# Altium PCB PCB.PcbDoc
Units mm, origin at the board's own origin, x right, y up, seen from the top; angles counter-clockwise.
Board outline 100 x 70 mm, 2 copper layers (Top Layer, Bottom Layer); 76 components, 40 nets, 292 pads, 35 vias.
Unrouted connection lines stored in the file: 70.
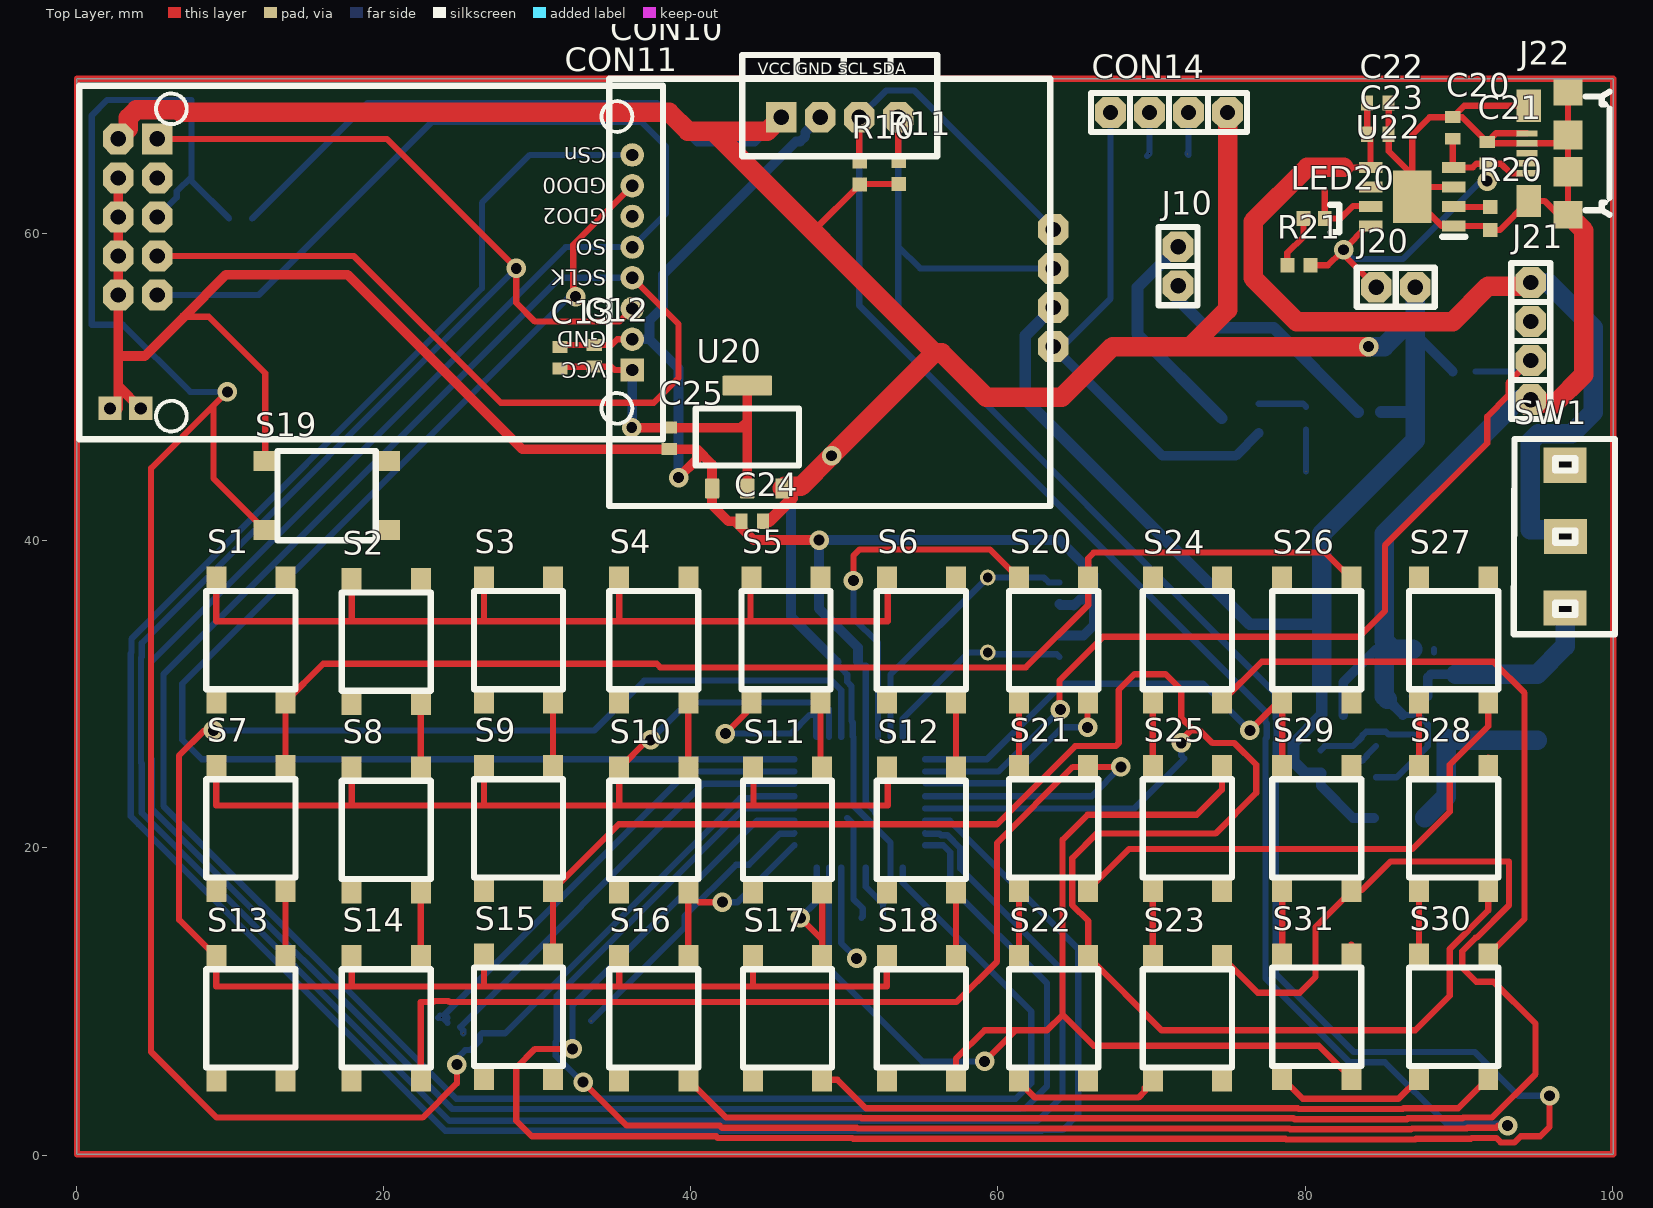
[diagram p0: Top Layer view]
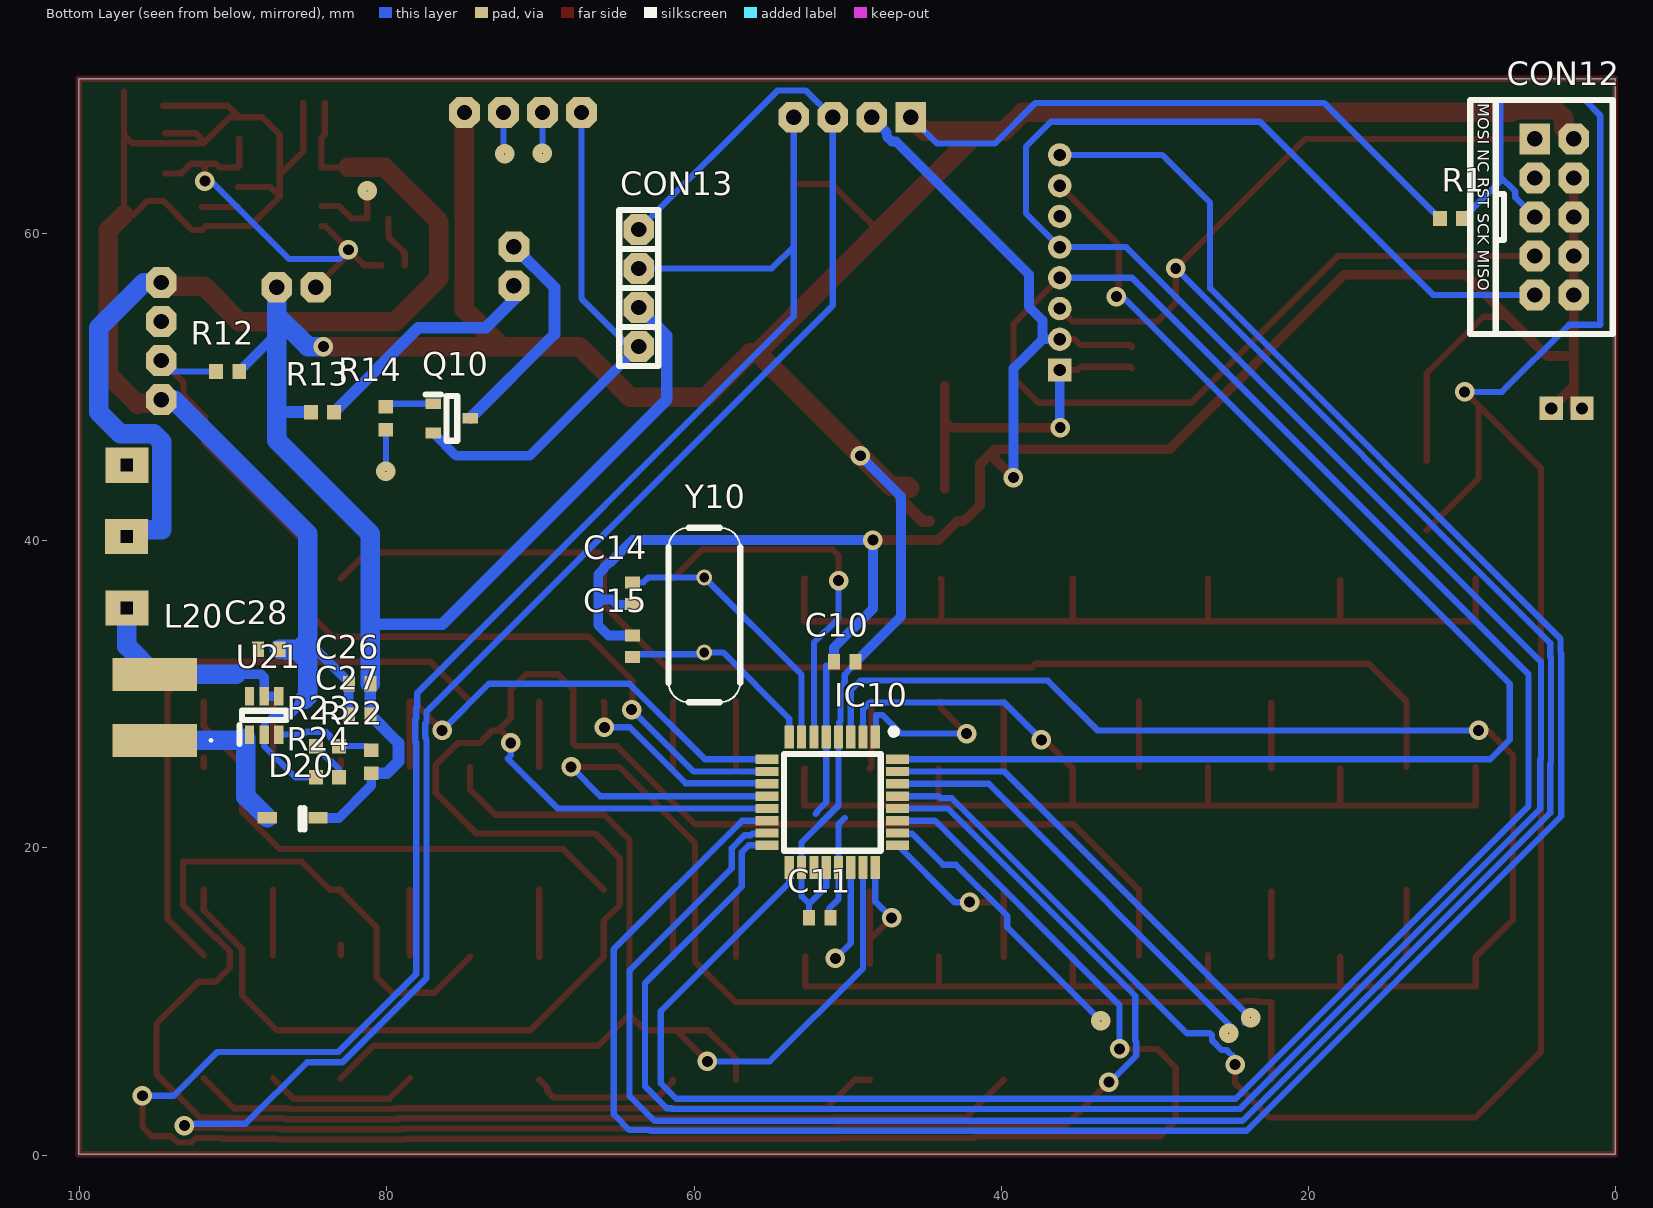
[diagram p1: Bottom Layer view, seen from below]
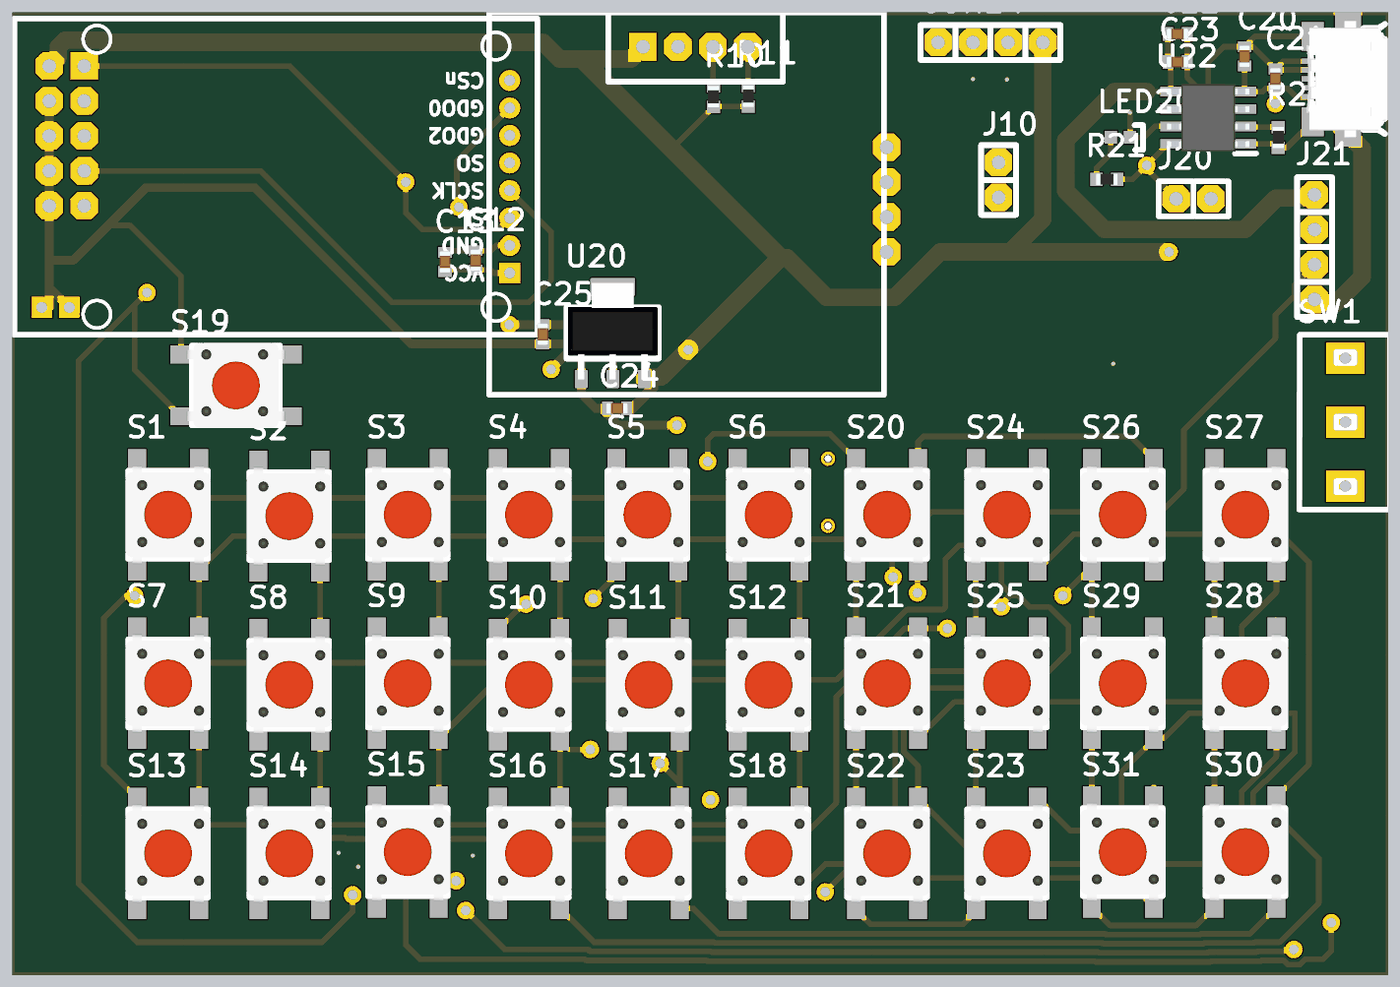
[diagram p2: 3D render of the assembled board from above, using the file's embedded part models]
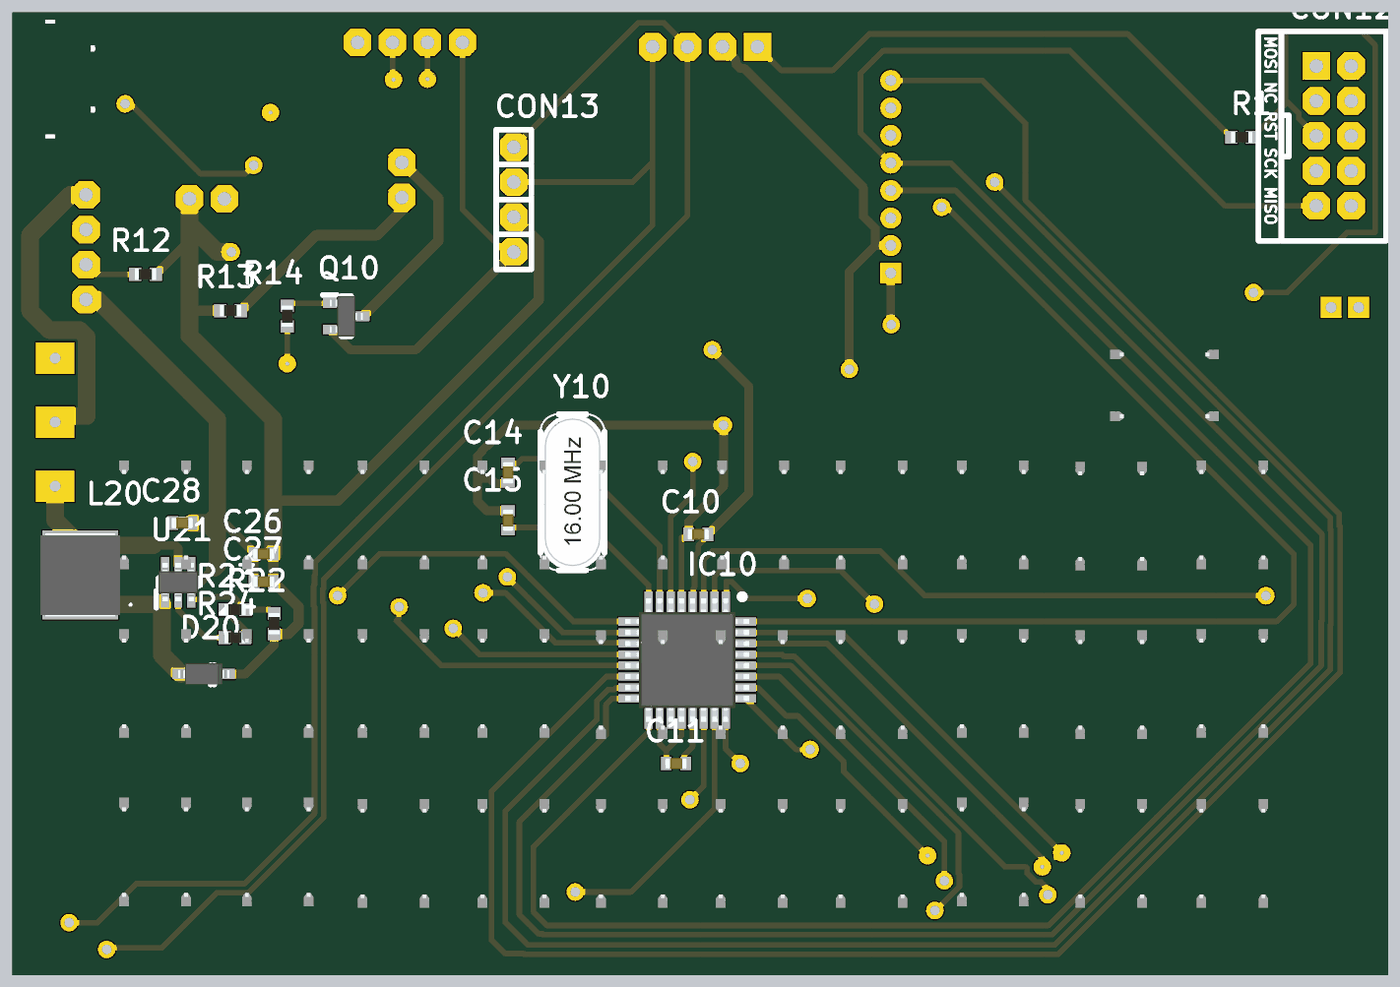
[diagram p3: 3D render of the assembled board from below, using the file's embedded part models]

## Layer stack, top to bottom
Top Solder: solder mask 0.0102, Solder Resist, Dk 3.5
Top Layer: signal copper 0.0356
Dielectric 1: dielectric 0.32, FR-4, Dk 4.8
Bottom Layer: signal copper 0.0356
Bottom Solder: solder mask 0.0102, Solder Resist, Dk 3.5

## Board outline
0.05,0.05 0.05,70.05 100.05,70.05 100.05,0.05

## Design rules (kind name [scope] priority, off if disabled: settings)
Clearance [All] p1: gap=0.254 ignorepadtopadclearanceinfootprint=FALSE except(0: Arc-Hole Track-Hole SMDPad-Hole THPad-Hole Via-Hole Fill-Hole Poly-Hole Region-Hole Text-Hole)
PolygonConnect [All] p1: connectstyle=Relief reliefconductorwidth=0.254 reliefentries=4 polygonreliefangle="90 Angle" airgapwidth=0.254
RoutingVias [All] p1: holewidth=0.711 width=1.27 viastyle="Through Hole" minholewidth=0.711 minwidth=1.27 maxholewidth=0.711 maxwidth=1.27
SolderMaskExpansion [All] p1: expansion=0.102 istentingtop=FALSE
Width [All] p1: maxlimit=3.048 minlimit=0.254 preferedwidth=0.406 minimp=50.000000 maximp=50.000000 favimp=50.000000
30 further rules are at their usual default settings.

## Classes and differential pairs
component class MCU: C10 C11 C12 C13 C14 C15 CON10 CON11 CON12 CON13 CON14 IC10 J10 Q10 R10 R11 R12 R13 R14 Y10
component class Guc: C20 C21 C22 C23 C24 C25 C26 C27 C28 D20 J20 J21 J22 L20 LED20 R20 R21 R22 R23 R24 SW1 U20 U21 U22
component class Buton: E I P Q R R1 S7 S8 S9 S10 S11 S12 S13 S14 S15 S16 S17 S18 S19 S21 S22 S23 S25 S27 S28 S29 S30 S31 T U W Y

## Components (designator, comment, footprint, x,y, rotation, side; value= is the part's Value field where it differs from the comment)
C10 "0.1uF" "0603 Capacitor" 50.19,32.106 r180 bottom
C11 "0.1uF" "0603 Capacitor" 51.816,15.443 r0 bottom
C12 "0.1uF" "0603 Capacitor" 33.731,52.019 r270 top
C13 "0.1uF" "0603 Capacitor" 31.496,51.906 r270 top
C14 "22pF" "0603 Capacitor" 64.008,36.576 r90 bottom
C15 "22pF" "0603 Capacitor" 64.008,33.122 r270 bottom
C20 "4.7uF" "0603 Capacitor" 89.611,66.853 r90 top
C21 "4.7uF" "0603 Capacitor" 91.846,65.227 r90 top
C22 "4.7uF" "0603 Capacitor" 84.734,68.478 r180 top
C23 "4.7uF" "0603 Capacitor" 84.734,66.446 r180 top
C24 "4.7uF" "0603 Capacitor" 44.004,41.25 r0 top
C25 "4.7uF" "0603 Capacitor" 38.608,46.646 r90 top
C26 "4.7uF" "0603 Capacitor" 81.777,30.683 r180 bottom
C27 "4.7uF" "0603 Capacitor" 81.777,28.651 r180 bottom
C28 "4.7uF" "0603 Capacitor" 87.692,32.918 r0 bottom
CON10 "SSD1306_BOARD" SSD1306_PCB 49.706,66.056 r0 top
CON11 "CC1101_433MHz" CC1101_433MHz 2.203,56.599 r90 top
CON12 "ISP" ISP 5.283,61.062 r270 bottom
CON13 "RTC" JumperHDR4 63.602,60.249 r270 bottom
CON14 "UART" JumperHDR4 74.95,67.858 r180 top
D20 "SOD-123 Diode" SOD123 86.132,21.946 r0 bottom
IC10 "ATMEGA328PB-AU" 328PB-AU 51.003,22.962 r270 bottom
J10 "VIBRA" JumperHDR 71.73,56.591 r90 top
J20 "USB_PWR" JumperHDR 84.633,56.49 r0 top
J21 "JumperHDR4" JumperHDR4 94.691,56.794 r270 top
J22 "MicroUSB" MicroUSB 97.113,65.205 r90 top
L20 "CD54NP-220MC" CD54NP220MC 95.098,29.143 r0 bottom
LED20 "0603 LED" "0603 LED" 80.645,60.96 r180 top
Q10 "MMBT3904" SOT95P240X120-3N 75.774,47.955 r180 bottom
R1 "10K" "0603 Resistor" 10.707,60.96 r0 bottom
R10 "10K" "0603 Resistor" 51.013,63.918 r90 top
R11 "10K" "0603 Resistor" 53.545,63.949 r90 top
R12 "10K" "0603 Resistor" 90.361,51.003 r0 bottom
R13 "33R" "0603 Resistor" 84.188,48.362 r180 bottom
R14 "4.7K" "0603 Resistor" 80.061,47.955 r90 bottom
R20 "1.2K" "0603 Resistor" 92.05,60.96 r90 top
R21 "1K" "0603 Resistor" 79.592,57.912 r180 top
R22 "4,7k" "0603 Resistor" 81.014,25.603 r270 bottom
R23 "470R" "0603 Resistor" 83.859,26.619 r180 bottom
R24 "200R" "0603 Resistor" 83.859,24.587 r180 bottom
S1 "Q" "TACT SWITCH SMD" 11.328,33.572 r270 top
S2 "W" "TACT SWITCH SMD" 20.136,33.472 r270 top
S3 "E" "TACT SWITCH SMD" 28.744,33.572 r270 top
S4 "R" "TACT SWITCH SMD" 37.552,33.572 r270 top
S5 "T" "TACT SWITCH SMD" 46.16,33.572 r270 top
S6 "Y" "TACT SWITCH SMD" 54.968,33.572 r270 top
S7 "U" "TACT SWITCH SMD" 11.328,21.311 r270 top
S8 "I" "TACT SWITCH SMD" 20.136,21.211 r270 top
S9 "O" "TACT SWITCH SMD" 28.744,21.311 r270 top
S10 "P" "TACT SWITCH SMD" 37.552,21.211 r270 top
S11 "A" "TACT SWITCH SMD" 46.26,21.211 r270 top
S12 "S" "TACT SWITCH SMD" 54.968,21.211 r270 top
S13 "D" "TACT SWITCH SMD" 11.328,8.95 r270 top
S14 "F" "TACT SWITCH SMD" 20.136,8.95 r270 top
S15 "G" "TACT SWITCH SMD" 28.744,9.05 r270 top
S16 "H" "TACT SWITCH SMD" 37.552,8.95 r270 top
S17 "J" "TACT SWITCH SMD" 46.26,8.95 r270 top
S18 "K" "TACT SWITCH SMD" 54.968,8.95 r270 top
S19 "RESET" "TACT SWITCH SMD" 16.256,42.875 r0 top
S20 "L" "TACT SWITCH SMD" 63.576,33.572 r270 top
S21 "Z" "TACT SWITCH SMD" 63.576,21.311 r270 top
S22 "X" "TACT SWITCH SMD" 63.576,8.95 r270 top
S23 "C" "TACT SWITCH SMD" 72.284,8.95 r270 top
S24 "V" "TACT SWITCH SMD" 72.284,33.572 r270 top
S25 "SHIFT" "TACT SWITCH SMD" 72.284,21.311 r270 top
S26 "B" "TACT SWITCH SMD" 80.703,33.572 r270 top
S27 "M" "TACT SWITCH SMD" 89.618,33.572 r270 top
S28 "N" "TACT SWITCH SMD" 89.618,21.311 r270 top
S29 "OPTION" "TACT SWITCH SMD" 80.704,21.311 r270 top
S30 "ALT" "TACT SWITCH SMD" 89.618,9.05 r270 top
S31 "ENTER" "TACT SWITCH SMD" 80.704,9.05 r270 top
SW1 "Slide Switch SS-12D10" "Slide Switch ss12d10" 93.726,40.557 r90 top
U20 "AMS1117-3.3V" AMS1117_SOT223 43.688,46.736 r90 top
U21 "MT3608" MT3608 87.986,28.62 r90 bottom
U22 "TP4056" TP4056A 86.97,62.382 r180 top
Y10 "" Crystal-HC49 59.334,35.155 r90 bottom value=16MHz

## Footprints (in the part's own frame and the unit in brackets; to place one, negate y for a bottom-side part, rotate by r counter-clockwise, add the part's x,y. Pads: shape width x height; smd on the part's side, far side on the other; paste and mask are expansions set on the pad)
328PB-AU [mm]
  rect 1.5x0.6 smd: 1(-4.25,2.8) 2(-4.25,2) 3(-4.25,1.2) 4(-4.25,0.4) 5(-4.25,-0.4) 6(-4.25,-1.2) 7(-4.25,-2) 8(-4.25,-2.8) 17(4.25,-2.8) 18(4.25,-2) 19(4.25,-1.2) 20(4.25,-0.4) 21(4.25,0.4) 22(4.25,1.2) 23(4.25,2) 24(4.25,2.8)
  rect 0.6x1.5 smd: 9(-2.8,-4.25) 10(-2,-4.25) 11(-1.2,-4.25) 12(-0.4,-4.25) 13(0.4,-4.25) 14(1.2,-4.25) 15(2,-4.25) 16(2.8,-4.25) 25(2.8,4.25) 26(2,4.25) 27(1.2,4.25) 28(0.4,4.25) 29(-0.4,4.25) 30(-1.2,4.25) 31(-2,4.25) 32(-2.8,4.25)
  silkscreen extent -4.8,-3.15 3.15,4.2, body extent -4.5,-4.5 4.5,4.5, height 1.2
"0603 Capacitor" [mm]
  rect 0.78x0.99 smd: 1(-0.7,0) 2(0.7,0)
  body extent -0.8,-0.41 0.8,0.4, height 0.9
"0603 LED" [mm]
  rect 0.9x0.95 smd: 1(-0.635,0) 2(0.75,0)
  silkscreen extent -1.58,-0.9 -0.97,0.9
"0603 Resistor" [mm]
  rect 0.9x0.95 smd: 1(-0.75,0) 2(0.75,0)
  body extent -0.77,-0.4 0.77,0.4, height 0.55
AMS1117_SOT223 [mm]
  rrect15% 1.31x0.93 smd: 1(-3.345,2.29) 2(-3.345,0) 3(-3.345,-2.29)
  rrect15% 1.31x3.24 smd: 2(3.345,0)
  silkscreen extent -1.86,-3.36 1.86,3.36, body extent -3.37,-3.25 3.63,3.25, height 1.84
CC1101_433MHz [mm]
  rect 1.524x1.524 hole 0.8: 1(-5.5,-34) 2(-8,-2) 2(-8,0)
  round 1.524 hole 0.8: 2(-3.5,-34) 3(-1.5,-34) 4(0.5,-34) 5(2.5,-34) 6(4.5,-34) 7(6.5,-34) 8(8.5,-34)
  silkscreen extent -10,-36 13,2
CD54NP220MC [mm]
  rect 5.5x2.15 smd: 1(0,2.15) 2(0,-2.15)
  silkscreen extent -3.7,2.1 -3.6,2.2, body extent -2.9,-3.01 2.9,3.01, height 4.95
Crystal-HC49 [mm]
  round 1.03 hole 0.63: 1(-2.44,0) 2(2.44,0)
  silkscreen extent -5.68,-2.33 5.68,2.33, body extent -5.67,-2.33 5.68,2.32, height 1.49
ISP [mm]
  rect 2x2 hole 1: 1(-5.08,0)
  oct 2x2 hole 1: 2(-5.08,2.54) 3(-2.54,0) 4(-2.54,2.54) 4(0,2.54) 4(2.54,2.54) 4(5.08,2.54) 5(0,0) 7(2.54,0) 9(5.08,0)
  silkscreen extent -7.62,-4.2 7.62,5.08
JumperHDR [mm]
  oct 2x2 hole 1: 1(0,0) 2(2.54,0)
  silkscreen extent -1.27,-1.27 3.81,1.27
JumperHDR4 [mm]
  oct 2x2 hole 1: 1(0,0) 2(2.54,0) 3(5.08,0) 4(7.62,0)
  silkscreen extent -1.27,-1.27 8.89,1.27
MicroUSB [mm]
  rect 0.4x1.35 smd: 1(-1.3,2.675) 2(-0.65,2.675) 3(0,2.675) 4(0.65,2.675) 5(1.3,2.675)
  rect 1.8x1.9 smd: 5(-4,0) 5(4,0)
  rect 2.1x1.6 smd: 5(-3.1,2.55) 5(3.1,2.55)
  rect 1.9x1.9 smd: 5(-1.2,0) 5(1.2,0)
  silkscreen extent -4,-2.7 4,-1.13, body extent -4.32,-2.8 4.33,3.1, height 2.76
MT3608 [mm]
  rect 1.2x0.6 smd: 1(-1.25,0.95) 2(-1.25,0) 3(-1.25,-0.95) 4(1.25,-0.95) 5(1.25,0) 6(1.25,0.95)
  silkscreen extent -1.85,-1.45 0.3,1.6, body extent -1.4,-1.45 1.4,1.45, height 1.45
"Slide Switch ss12d10" [mm]
  rect 2.3x2.8 hole 0.8 square: 1(-4.95,-3.2) 2(-0.294,-3.204) 3(4.35,-3.2)
  silkscreen extent -6.65,-6.45 6.05,0.15
SOD123 [mm]
  rect 1.25x0.75 smd: 1(-1.65,0) 2(1.65,0)
  silkscreen extent -0.76,-0.64 -0.51,0.76, body extent -1.85,-0.77 1.85,0.77, height 1.35
SOT95P240X120-3N [mm]
  rect 1x0.7 smd: 1(-1.2,0.95) 2(-1.2,-0.95) 3(1.2,0)
  silkscreen extent -1.7,-1.46 0.35,1.55, body extent -1.2,-1.46 1.2,1.46, height 1.2
SSD1306_PCB [mm]
  rect 2x2 hole 1: 1(-3.81,1.492)
  oct 2x2 hole 1: 2(-1.27,1.492) 3(1.27,1.492) 4(3.81,1.492)
  silkscreen extent -15,-23.81 13.7,5.56
"TACT SWITCH SMD" [mm]
  rect 1.55x1.3 smd: 1(-3.95,2.3) 1(4.05,2.3) 2(-3.95,-2.2) 2(4.05,-2.2)
  silkscreen extent -3.15,-2.85 3.25,2.95, body extent -3.9,-3.05 4,3.15, height 7
TP4056A [mm]
  rect 1.525x0.7 smd: 1(-2.712,1.905) 2(-2.712,0.635) 3(-2.712,-0.635) 4(-2.712,-1.905) 5(2.712,-1.905) 6(2.712,-0.635) 7(2.712,0.635) 8(2.712,1.905)
  rect 2.513x3.402 smd: 3(0,0)
  silkscreen extent -3.47,2.61 -1.95,2.61, body extent -3,-2.45 3,2.45, height 1.75

## Part data
C10 C11 C12 C13 C14 C15 C20 C21 C22 C23 C24 C25 C26 C27 C28: library part "0603 Capacitor", "Capacitor", Arrow Part Number=06031A120JAT2A, Manufacturer_Name=AVX, Mouser Part Number=581-06031A120J, Arrow Price/Stock=https://www.arrow.com/en/products/06031a120jat2a/avx, Datasheet Link=http://www.mouser.com/catalog/supplier/library/pdf/AVXSurfaceMountCeramic.pdf, Height=0.9mm, Manufacturer_Part_Number=06031A120JAT2A, Mouser Price/Stock=https://www.mouser.co.uk/ProductDetail/AVX/06031A120JAT2A?qs=tMrmimOZp5UsY%252BxF6dNGxQ%3D%3D
CON13 CON14: library part JumperHDR4
D20: "Diode", Arrow Part Number=1N4148W-G3-08, Manufacturer_Name=Vishay, Mouser Part Number=78-1N4148W-G3-08, Arrow Price/Stock=https://www.arrow.com/en/products/1n4148w-g3-08/vishay, Datasheet Link=https://componentsearchengine.com/Datasheets/1/1N4148W-G3-08.pdf, Height=1.35mm, Manufacturer_Part_Number=1N4148W-G3-08, Mouser Price/Stock=https://www.mouser.co.uk/ProductDetail/Vishay-Semiconductors/1N4148W-G3-08?qs=uS%252BVSIFnvp46StDBB15x4Q%3D%3D
IC10: "Integrated Circuit", Manufacturer_Name=Microchip, Mouser Part Number=556-ATMEGA328PB-AU, Arrow Part Number=ATMEGA328PB-AU, Arrow Price/Stock=https://www.arrow.com/en/products/atmega328pb-au/microchip-technology, Datasheet Link=http://www.farnell.com/datasheets/2014286.pdf, Height=1.2mm, Manufacturer_Part_Number=ATMEGA328PB-AU, Mouser Price/Stock=https://www.mouser.co.uk/ProductDetail/Microchip-Technology-Atmel/ATMEGA328PB-AU?qs=jy4bLUHv09hbFONgGrqPbw%3D%3D
J10 J20: library part JumperHDR_ALT
J22: Package=None, Availability=Unavailable, MF=Hirose, MP=ZX62-B-5PA, Price=None, SnapEDA_Link=https://www.snapeda.com/parts/ZX62-B-5PA/Hirose%20Electric%20Co%20Ltd/view-part/134668/?ref=snap
L20: "Inductor", Manufacturer_Name=Sumida, Mouser Part Number=851-CD54NP-220MC, Arrow Part Number=CD54NP-220MC, Arrow Price/Stock=https://www.arrow.com/en/products/cd54np-220mc/sumida, Datasheet Link=https://www.mouser.com/datasheet/2/390/CD54-465574.pdf, Height=4.85mm, Manufacturer_Part_Number=CD54NP-220MC, Mouser Price/Stock=https://www.mouser.co.uk/ProductDetail/Sumida/CD54NP-220MC?qs=ttApTud31JaKcWkDFuIZsQ%3D%3D
LED20: "LED", Manufacturer_Name="Wurth Elektronik", Manufacturer_Part_Number=150060GS55040, Mouser Part Number=710-150060GS55040, Datasheet Link=https://katalog.we-online.de/led/datasheet/150060GS55040.pdf, Height=0.5mm, Mouser Price/Stock=https://www.mouser.com/Search/Refine.aspx?Keyword=710-150060GS55040
Q10: "Transistor BJT NPN", Manufacturer_Name="ON Semiconductor", Mouser Part Number=512-MMBT3904, Arrow Part Number=MMBT3904, Arrow Price/Stock=https://www.arrow.com/en/products/mmbt3904/on-semiconductor, Datasheet Link=https://media.digikey.com/pdf/Data%20Sheets/ON%20Semiconductor%20PDFs/2N3904,MMBT3904,PZT3904.pdf, Height=1.2mm, Manufacturer_Part_Number=MMBT3904, Mouser Price/Stock=https://www.mouser.co.uk/ProductDetail/ON-Semiconductor-Fairchild/MMBT3904?qs=UMEuL5FsraCg3xKjS4uBJQ%3D%3D
R1 R10 R11 R12 R13 R14 R20 R21 R22 R23 R24: library part "0603 Resistor", "Resistor", Arrow Part Number=CPF0603B100RE1, Manufacturer_Name="TE Connectivity", Mouser Part Number=279-CPF0603B100RE1, Arrow Price/Stock=https://www.arrow.com/en/products/cpf0603b100re1/te-connectivity, Datasheet Link=http://www.farnell.com/datasheets/1786775.pdf, Height=0.55mm, Manufacturer_Part_Number=CPF0603B100RE1, Mouser Price/Stock=https://www.mouser.co.uk/ProductDetail/TE-Connectivity-Neohm/CPF0603B100RE1?qs=DfH2yQaBz6s2KWheq2AlNw%3D%3D
S1 S2 S3 S4 S5 S6 S7 S8 S9 S10 S11 S12 S13 S14 S15 S16 S17 S18 S19 S20 S21 S22 S23 S24 S25 S26 S27 S28 S29 S30 S31: library part "TACT SWITCH SMD", Package=None, Availability=Unavailable, MF=Omron, MP=B3F-1000, Price=None, SnapEDA_Link=https://www.snapeda.com/parts/B3F-1000/Omron%20Electronics%20Inc-EMC%20Div/view-part/48569/?ref=snap
U20: library part AMS1117, Package="SOT-223 Seeed Technology", Availability=Unavailable, MF="Seeed Technology", MP=AMS1117, Price=None, SnapEDA_Link=https://www.snapeda.com/parts/AMS1117/Seeed%20Technology%20Co.%2C%20Ltd/view-part/184428/?ref=snap
U21: "Undefined or Miscellaneous", Manufacturer_Name=Aerosemi, Datasheet Link=https://www.olimex.com/Products/Breadboarding/BB-PWR-3608/resources/MT3608.pdf, Height=1.45mm, Manufacturer_Part_Number=MT3608
U22: "Connector", Manufacturer_Name="NanJing Top Power", Datasheet Link=https://dlnmh9ip6v2uc.cloudfront.net/datasheets/Prototyping/TP4056.pdf, Height=1.75mm, Manufacturer_Part_Number=TP4056
Y10: library part "HC49 Crystal", Package="HC-49/US ECS International", Digi-Key_Part_Number=X1115-ND, Digi-Key_Purchase_URL=https://www.digikey.in/product-detail/en/ecs-inc/ECS-80-18-4XDN/X1115-ND/827606?utm_source=snapeda&utm_medium=aggregator&utm_campaign=symbol, MF="ECS Inc.", MP=ECS-80-18-4XDN, SnapEDA_Link=https://www.snapeda.com/parts/ECS-80-18-4XDN/ECS%20Inc./view-part/49558/?ref=snap

## Via types
v1: diameter 1.27, hole 0.711, Top Layer to Bottom Layer, 28 vias
v2: diameter 0/1.27 (per signal layer), hole 0, Top Layer to Bottom Layer, 7 vias

## Nets (pads, with @x,y where several pads share a name; then routed paths per layer and width w, separated by ;. In a path a pad name is that pad's centre, name@x,y a point inside that pad or via, vN(x,y) a via of type N, cw(c..) or ccw(c..) an arc to the next point about the centre after c; other vN are vias at no path point)
3V3: C12.2 C13.2 C25.2 CON11.1 U20.2 | length 23
  Top Layer w0.406: C13.2 31.609,51.319 C12.2 34.838,51.319 35.058,51.099 CON11.1
  Top Layer w0.635: v1(36.17,47.346) C25.2 43.282,47.346 43.688,47.752 ; U20.2@43.688,43.391 43.688,47.752 ; U20.2@43.688,50.081 43.688,47.752
  Bottom Layer w0.635: v1(36.17,47.346) 36.203,47.379 CON11.1
5V: C10.2 C11.2 C24.2 C26.2 C27.2 CON10.1 CON12.2 CON13.3 CON14.1 D20.1 IC10.4 IC10.18 IC10.20 J20.2 R1.2 R10.1 R11.1 R12.1 R13.1 R22.2 U20.3 | length 296.5
  Top Layer w0.406: 47.993,60.147 R10.1 51.045,63.199 R11.1 R11.1@53.513,63.168
  Top Layer w0.762: C24.2 45.11,41.25 46.615,42.754 U20.3
  Top Layer w1.27: CON12.2 3.394,66.793 3.394,67.51 3.915,68.031 6.651,68.031 6.813,67.869 38.608,67.869 39.827,66.65 41.453,66.65 ; CON10.1 44.998,66.65 41.453,66.65 ; U20.3 46.112,43.525 47.182,43.525 v1(49.174,45.517) 55.88,52.222 ; CON13.3 CON13.3@63.927,54.843 ; CON14.1 74.95,55.036 72.542,52.629 ; v1(84.125,52.629) 72.542,52.629 ; 41.453,66.65 55.88,52.222 ; 55.88,52.222 56.344,52.222 59.246,49.32 64.153,49.32 67.462,52.629 72.542,52.629
  Bottom Layer w0.406: R1.2 18.975,68.478 37.795,68.478 40.437,65.837 44.185,65.837 CON10.1 ; C10.2 49.49,32.001 50.043,31.448 50.043,31.421 50.19,31.274 50.19,30.804 50.464,30.531 50.464,28.248 50.56,28.151 50.56,27.254 IC10.4 50.603,22.752 53.003,20.352 IC10.18 53.003,16.834 52.516,16.346 ; IC10.20 51.403,17.459 52.516,16.346 ; C11.2 52.516,16.346
  Bottom Layer w0.635: v1(49.174,45.517) 46.533,42.875 46.533,35.063 C10.2 ; R22.2 81.014,24.04 83.109,21.946 D20.1 ; 87.173,53.442 R12.1
  Bottom Layer w0.762: CON13.3 61.773,53.34 61.773,49.174 76.403,34.544 81.077,34.544 ; R22.2 79.998,24.853 79.248,25.603 79.248,26.822 C27.2 C26.2 ; R13.1 86.97,48.362 87.173,48.565
  Bottom Layer w1.27: C26.2 81.077,34.544 81.077,40.437 87.173,46.533 87.173,48.565 87.173,53.442 87.173,54.661 ; v1(84.125,52.629) 85.141,52.629 87.173,54.661 ; J20.2 87.173,54.661
5VUSB: C20.1 C21.1 J20.1 J22.1 R21.1 U22.4 U22.8 | length 28
  Top Layer w0.406: R21.1 81.483,57.912 v1@82.347,58.776 ; U22.8 84.049,60.477 v1(82.499,58.928) v1@82.347,58.776 ; J20.1 v1@82.347,58.776 ; C20.1 89.611,64.358 U22.4 90.907,64.287 91.146,64.527 C21.1 ; v1(91.846,63.398) C21.1 ; J22.1@94.431,63.898 93.574,63.898 93.567,63.905 93.371,63.905 92.75,64.527 C21.1
  Bottom Layer w0.406: v1(82.499,58.928) 83.109,58.318 86.36,58.318 91.44,63.398 v1(91.846,63.398)
BATIN: C22.2 C23.2 J21.1 SW1.2 U22.5 | length 60.7
  Top Layer w0.406: 82.499,64.287 U22.5 84.258,66.223 C23.2 C22.2
  Top Layer w1.27: 82.499,64.287 80.137,64.287 76.606,60.757 76.606,57.099 79.451,54.254 89.611,54.254 91.914,56.557 94.454,56.557 J21.1
  Bottom Layer w1.27: J21.1 95.809,56.794 98.755,53.848 98.755,48.362 97.34,46.946 95.158,46.946 94.637,46.425 94.637,40.694 SW1.2@96.5,40.694
BATT_HDQ: IC10.10 J21.3 R12.2 | length 59.7
  Top Layer w0.406: v1(64.069,28.996) 64.008,29.058 64.008,30.886 66.853,33.731 83.515,33.731 85.191,35.407 85.191,39.674 91.846,46.33 91.846,48.07 93.234,49.457 93.234,50.257 J21.3
  Bottom Layer w0.406: IC10.10 59.424,24.962 60.034,24.962 v1(64.069,28.996) ; R12.2 94.25,51.003 94.691,51.444 J21.3
CHGSTAT: IC10.26 LED20.1 U22.7 | length 23.9
  Top Layer w0.406: v2@81.28,62.789 v2(81.28,62.763) LED20.1 82.296,60.96 83.109,61.773 84.232,61.773 U22.7
  Bottom Layer w0.406: v2(33.528,8.738) 39.624,14.834 39.624,15.565 42.956,18.898 43.793,18.898 45.814,20.919 46.71,20.919 IC10.26
GD0: CON11.7 IC10.32 | length 88.9
  Top Layer w0.406: v1(32.512,55.88) 32.354,56.038 32.354,59.25 CON11.7
  Bottom Layer w0.406: v1(32.512,55.88) 32.106,55.88 26.619,50.394 6.909,30.683 6.909,27.026 8.173,25.762 IC10.32
GND: C10.1 C11.1 C12.1 C13.1 C14.1 C15.1 C20.2 C21.2 C22.1 C23.1 C24.1 C25.1 C26.1 C27.1 C28.1 CON10.2 CON11.2 CON12.4 CON13.4 CON14.4 IC10.5 IC10.21 J21.4 J22.4 J22.5 Q10.2 R20.1 R24.1 S19.1 U20.1 U21.2 U22.1 U22.3 | length 320.4
  Top Layer w0.406: 7.01,54.559 8.636,54.559 12.306,50.889 S19.1@12.306,45.175 ; C13.1 31.609,52.719 C12.1 34.838,52.719 35.218,53.099 CON11.2@36.203,53.099 ; C22.1 C23.1 85.434,65.34 U22.3@86.97,63.805 ; U22.3@89.682,63.017 87.605,63.017 U22.3@86.97,62.382 ; J22.4 J22.4@94.438,65.863 ; J22.5@94.438,66.505 92.425,66.505 C21.2 ; J22.5@94.563,68.305 90.364,68.305 C20.2 ; J22.5@97.113,69.205 J22.5@97.113,66.405 ; U22.3@86.97,62.382 88.875,60.477 U22.1 91.782,60.477 R20.1 92.668,60.21 94.563,62.105 95.578,62.105 96.478,61.205 97.113,61.205 97.113,64.005 J22.5@97.113,66.405 ; U22.3@86.97,62.382 U22.3@86.97,63.805 ; U22.3@86.97,63.805 86.97,66.424 88.098,67.553 C20.2 ; C20.2 90.221,67.553 C21.2 ; C21.2 91.911,65.863 J22.4@94.438,65.863 ; J22.4@94.438,65.863 96.571,65.863 J22.5@97.113,66.405
  Top Layer w0.635: CON11.2@2.743,48.599 2.743,50.059 ; CON12.4@2.743,63.602 2.743,61.062 2.743,58.522 2.743,55.982 2.743,52.019 ; CON11.2@4.203,48.599 2.743,50.059 ; v1(39.218,44.094) 40.414,45.291 40.414,45.946 ; v1(48.362,40.03) 44.106,40.03 42.886,41.25 42.469,41.25 41.398,42.32 U20.1 41.398,44.962 40.414,45.946 ; 2.743,50.059 2.743,52.019 ; 2.743,52.019 4.47,52.019 7.01,54.559 9.754,57.302 17.678,57.302 29.035,45.946 C25.1 40.414,45.946
  Top Layer w1.27: J21.4 94.928,48.937 96.147,48.937 96.215,48.87 98.146,50.8 98.146,60.173 J22.5@97.113,61.205
  Bottom Layer w0.406: 50.19,21.946 50.603,21.533 IC10.21 50.603,16.656 51.206,16.053 51.206,15.534 C11.1 ; C10.1@51.077,31.868 51.403,31.868 IC10.5 51.403,22.968 52.019,22.352 52.019,22.27 52.08,22.209 ; CON13.4 64.211,52.629 67.33,55.748 CON14.4 ; R24.1 85.954,24.587 87.986,26.619 U21.2 87.986,28.042 87.376,28.651 86.36,28.651
  Bottom Layer w0.635: CON11.2@36.203,53.099 37.325,53.099 ; v1(39.218,44.094) 39.218,51.206 37.325,53.099 ; CON10.2 47.467,66.579 47.467,66.311 47.132,65.976 46.864,65.976 38.202,57.314 38.202,55.212 37.325,54.335 37.325,53.099 ; C10.1 50.89,33.031 48.362,35.56 v1(48.362,40.03) 64.008,40.03 65.485,38.554 65.553,38.554 65.887,38.219 65.887,38.151 66.243,37.795 66.243,36.17 ; CON13.4 70.714,45.517 75.486,45.517 Q10.2 ; C15.1 65.578,33.822 66.243,34.487 66.243,36.17 ; C14.1 64.081,35.803 64.895,35.803 64.937,35.761 65.345,36.17 66.243,36.17 ; C27.1 C26.1 82.477,30.77 84.626,32.918 85.141,32.918 85.713,32.918 ; 85.344,29.667 86.36,28.651 ; 85.513,32.546 86.62,32.546 C28.1
  Bottom Layer w1.27: 85.344,29.667 85.141,29.87 85.141,32.174 85.513,32.546 ; C28.1 85.713,32.918 85.141,33.491 85.141,40.437 93.878,49.174 J21.4
KB0: IC10.11 S1.1 S7.1 S13.1 S20.1 S26.1 | length 98.4
  Top Layer w0.406: S13.1@13.628,12.9 S7.1@13.628,17.261 ; S7.1@13.628,25.261 13.628,29.522 16.084,31.979 37.793,31.979 38.028,31.743 61.817,31.743 65.876,35.802 65.876,37.522 65.876,38.85 66.243,39.218 81.308,39.218 S26.1@83.003,37.522 ; v1(65.837,27.838) 65.837,29.483 S20.1@65.876,29.522
  Bottom Layer w0.406: IC10.11@55.296,24.204 56.193,24.204 60.558,24.204 64.192,27.838 v1(65.837,27.838)
KB1: IC10.12 S2.1 S8.1 S14.1 S21.1 S27.1 | length 117.5
  Top Layer w0.406: S14.1@22.436,4.9 22.436,9.957 23.246,9.957 23.322,10.033 24.227,10.033 24.303,9.957 57.302,9.957 59.944,12.598 59.944,20.32 64.885,25.261 65.876,25.261 v1(68.008,25.261) ; S14.1@22.436,12.9 S8.1@22.436,17.161 ; S8.1@22.436,25.161 S2.1@22.436,29.422 ; S21.1@65.876,17.261 68.528,19.914 86.97,19.914 89.408,22.352 89.408,25.4 91.918,27.91 S27.1@91.918,29.522
  Bottom Layer w0.406: IC10.12 66.108,23.362 v1(68.008,25.261)
KB2: IC10.13 S3.1 S9.1 S15.1 S22.1 S28.1 | length 143.3
  Top Layer w0.406: S15.1@31.044,13 31.044,17.261 35.322,21.539 59.944,21.539 65.024,26.619 67.666,26.619 67.869,26.822 67.869,30.277 68.885,31.293 70.917,31.293 71.933,30.277 71.933,28.448 72.644,27.737 ; S9.1@31.044,25.261 S3.1@31.044,29.522 ; v1(71.933,26.822) 71.933,27.026 72.542,27.635 ; 72.746,27.635 73.152,27.635 73.965,26.822 75.387,26.822 76.81,25.4 76.81,23.571 74.168,20.93 66.446,20.93 64.845,19.328 64.845,16.271 65.876,15.24 65.876,12.9 70.648,8.128 87.173,8.128 89.408,10.363 89.408,13.411 91.918,15.921 S28.1@91.918,17.261 ; S28.1@91.918,25.261 S28.1@91.918,25.878
  Bottom Layer w0.406: IC10.13 68.891,22.562 72.136,25.806 71.933,26.01 v1(71.933,26.822)
KB3: IC10.25 S4.1 S10.1 S16.1 S23.1 S29.1 | length 117.1
  Top Layer w0.406: S16.1@39.852,4.9 42.314,2.438 51.085,2.438 51.136,2.388 79.248,2.388 79.299,2.337 86.623,2.337 86.673,2.388 90.239,2.388 90.29,2.438 92.158,2.438 94.996,5.276 94.996,8.542 92.26,11.278 91.135,11.278 90.221,12.192 90.221,13.267 91.11,14.156 91.169,14.156 93.269,16.256 93.269,19.101 85.547,19.101 83.708,17.261 83.003,17.261 83.003,17.167 80.67,14.834 80.67,11.582 79.654,10.566 76.918,10.566 S23.1@74.584,12.9 ; S16.1@39.852,12.9 S10.1@39.852,17.161 ; S10.1@39.852,25.161 S4.1@39.852,29.522 ; 40.554,16.459 v1(42.062,16.459) ; S29.1@83.003,25.261 S29.1@83.003,25.701
  Bottom Layer w0.406: v1(42.062,16.459) 43.051,16.459 IC10.25
KB4: IC10.24 S5.1 S11.1 S17.1 S24.1 S30.1 | length 99.5
  Top Layer w0.406: v1(47.142,15.443) 48.56,14.025 ; S5.1@48.46,29.522 48.46,25.261 S11.1@48.56,25.161 ; S17.1@48.56,4.9 49.558,4.9 51.41,3.048 69.088,3.048 79.522,3.048 79.572,2.997 86.349,2.997 86.4,3.048 89.966,3.048 S30.1@91.918,5 ; S17.1@48.56,12.44 48.56,12.9 48.56,14.025 ; S11.1@48.56,17.161 48.56,14.025 ; S24.1@74.584,29.522 77.167,32.106 92.253,32.106 94.285,30.074 94.285,15.367 S30.1@91.918,13
  Bottom Layer w0.406: v1(47.142,15.443) 48.203,16.504 IC10.24
KB5: IC10.23 S6.1 S12.1 S18.1 S25.1 S31.1 | length 86
  Top Layer w0.406: S18.1@57.268,4.9 57.268,6.265 59.131,8.128 61.163,8.128 ; S18.1@57.268,12.9 S12.1@57.268,17.161 ; S12.1@57.268,25.161 S6.1@57.268,29.522 ; v1(59.131,6.096) 61.163,8.128 ; S25.1@74.584,25.261 74.584,23.784 72.949,22.149 65.837,22.149 64.211,20.523 64.211,9.144 ; S31.1@83.003,5 80.891,7.112 66.243,7.112 64.211,9.144 ; S31.1@83.003,13 S31.1@83.003,13.712 ; 61.163,8.128 63.195,8.128 64.211,9.144
  Bottom Layer w0.406: IC10.23 49.003,12.16 55.067,6.096 v1(59.131,6.096)
KBA: IC10.1 S1.2 S2.2 S3.2 S4.2 S5.2 S6.2 | length 71
  Top Layer w0.406: S1.2@9.128,37.522 9.128,34.747 17.936,34.747 ; S2.2@17.936,37.422 17.936,34.747 ; S3.2@26.544,37.522 26.544,34.747 ; S4.2@35.352,37.522 35.352,34.747 ; v1(42.266,27.432) 43.96,29.126 S5.2@43.96,29.522 ; S5.2@43.96,37.522 43.891,37.454 43.891,34.747 ; S6.2@52.768,37.522 52.832,37.522 52.832,34.747 43.891,34.747 ; 17.936,34.747 26.544,34.747 ; 26.544,34.747 35.352,34.747 ; 35.352,34.747 43.891,34.747
  Bottom Layer w0.406: v1(42.266,27.432) 46.533,27.432 47.752,28.651 48.158,28.651 48.158,27.256 IC10.1
KBB: IC10.2 S7.2 S8.2 S9.2 S10.2 S11.2 S12.2 | length 75.9
  Top Layer w0.406: S7.2@9.128,25.261 9.128,22.758 17.936,22.758 ; S8.2@17.936,25.161 17.936,22.758 ; S9.2@26.544,25.261 26.544,22.758 ; v1(37.389,27.026) 37.217,27.026 35.352,25.161 35.357,25.161 35.357,22.758 ; S11.2@44.06,25.161 44.094,25.161 44.094,22.758 ; S12.2@52.768,25.161 52.832,25.161 52.832,22.758 44.094,22.758 ; 17.936,22.758 26.544,22.758 ; 26.544,22.758 35.357,22.758 ; 35.357,22.758 44.094,22.758
  Bottom Layer w0.406: v1(37.389,27.026) 39.827,29.464 48.565,29.464 49.003,29.026 IC10.2
KBC: IC10.3 S13.2 S14.2 S15.2 S16.2 S17.2 S18.2 | length 117.8
  Top Layer w0.406: v1(8.941,27.635) 8.331,27.635 6.706,26.01 6.706,15.322 9.128,12.9 9.128,10.973 17.936,10.973 ; S14.2@17.936,12.9 17.936,10.973 ; S15.2@26.544,13 26.544,10.973 ; S16.2@35.352,12.9 35.352,10.973 ; S17.2@44.06,12.9 44.06,10.973 ; S18.2@52.768,12.9 52.768,10.973 44.06,10.973 ; 17.936,10.973 26.544,10.973 ; 26.544,10.973 35.352,10.973 ; 35.352,10.973 44.06,10.973
  Bottom Layer w0.406: v1(8.941,27.635) 33.731,27.635 36.982,30.886 49.174,30.886 49.803,30.258 IC10.3
KBD: IC10.6 S20.2 S21.2 S22.2 S23.2 S24.2 S25.2 | length 51.3
  Top Layer w0.406: v1(50.597,37.389) 50.597,39.014 51.003,39.421 59.478,39.421 S20.2@61.376,37.522 ; S22.2@61.376,4.9 61.376,4.775 62.407,3.744 69.156,3.744 69.561,4.149 69.561,4.377 S23.2@70.084,4.9 ; S22.2@61.376,12.9 S21.2@61.376,17.261 ; S21.2@61.376,25.261 S20.2@61.376,29.522 ; S23.2@70.084,12.9 S25.2@70.084,17.261 ; S25.2@70.084,25.261 S24.2@70.084,29.522
  Bottom Layer w0.406: v1(50.597,37.389) 50.597,34.95 52.203,33.344 IC10.6
KBE: IC10.9 S26.2 S27.2 S28.2 S29.2 S30.2 S31.2 | length 54.4
  Top Layer w0.406: v1(76.403,27.635) 78.29,29.522 78.503,29.522 S29.2@78.503,25.261 ; S31.2@78.503,5 79.846,3.658 86.075,3.658 S30.2@87.418,5 ; S31.2@78.503,13 S29.2@78.503,17.261 ; S30.2@87.418,13 S28.2@87.418,17.261 ; S28.2@87.418,25.261 S27.2@87.418,29.522
  Bottom Layer w0.406: IC10.9 59.29,25.762 64.211,30.683 73.355,30.683 v1(76.403,27.635)
MISO: CON11.5 CON12.9 IC10.16 | length 184.7
  Bottom Layer w0.406: CON12.9 11.887,55.982 23.165,67.259 36.779,67.259 38.405,65.634 38.405,61.301 CON11.5 31.87,59.099 4.877,32.106 4.877,25.806 4.928,25.756 4.928,22.543 24.474,2.997 61.437,2.997 61.488,3.048 61.773,3.048 63.195,4.47 63.195,11.176 56.896,17.475 56.896,19.71 56.445,20.162 IC10.16
MOSI: CON11.3 CON12.1 IC10.15 | length 173.6
  Top Layer w0.406: CON12.1 20.218,66.142 v1(28.651,57.709) 28.651,55.474 29.87,54.254 35.358,54.254 CON11.3
  Bottom Layer w0.406: v1(28.651,57.709) 4.267,33.325 4.267,32.43 4.216,32.379 4.216,25.736 4.216,25.533 4.267,25.482 4.267,22.27 24.302,2.235 62.586,2.235 64.211,3.861 64.211,12.004 57.556,18.658 57.556,19.984 56.718,20.822 56.289,20.822 56.193,20.919 55.296,20.919 IC10.15
MOT: IC10.22 R14.1 | length 9
  Bottom Layer w0.406: IC10.22 49.803,13.798 v1(50.8,12.802) ; v2(80.061,44.501) R14.1
NetC14_2: C14.2 IC10.7 Y10.2 | length 17.8
  Bottom Layer w0.406: IC10.7 53.003,31.264 Y10.2 62.981,37.595 63.301,37.276 C14.2
NetC15_2: C15.2 IC10.8 Y10.1 | length 13.3
  Bottom Layer w0.406: IC10.8 53.803,28.403 58.115,32.715 Y10.1 59.454,32.596 63.834,32.596 C15.2
NetD20_2: D20.2 L20.1 U21.1 | length 11.7
  Bottom Layer w1.27: D20.2 89.175,23.338 89.175,27.131 89.313,26.993 L20.1
NetJ10_1: J10.1 R13.2 | length 15.9
  Bottom Layer w0.762: J10.1 71.73,56.366 71.385,56.022 73.558,53.848 77.951,53.848 R13.2
NetJ10_2: J10.2 Q10.3 | length 14.5
  Bottom Layer w0.762: J10.2 69.088,56.49 69.088,53.442 Q10.3
NetLED20_2: LED20.2 R21.2 | length 3.5
  Top Layer w0.406: R21.2 78.842,58.725 79.895,59.778 LED20.2
NetQ10_1: Q10.1 R14.2 | length 3.2
  Bottom Layer w0.406: Q10.1 79.861,48.905 R14.2
NetR20_2: R20.2 U22.2 | length 2.4
  Top Layer w0.406: U22.2 89.719,61.71 R20.2
NetR22_1: R22.1 R23.2 U21.3 | length 6.6
  Bottom Layer w0.406: R22.1 81.28,26.619 R23.2 83.702,27.212 83.702,27.284 83.969,27.551 85.248,27.551 85.429,27.37 U21.3
NetR23_1: R23.1 R24.2 | length 2.7
  Bottom Layer w0.406: R24.2 83.109,25.119 83.677,25.687 83.748,25.687 84.016,25.955 84.016,26.026 R23.1
RESET: CON12.5 IC10.29 R1.1 S19.2 | length 151.4
  Top Layer w0.406: v1(9.846,49.673) 8.941,48.768 ; S19.2@12.306,40.675 8.941,44.04 8.941,48.768 ; v1(24.79,5.893) 24.79,4.674 22.555,2.438 9.144,2.438 4.877,6.706 4.877,44.704 8.941,48.768
  Bottom Layer w0.406: CON12.5 6.556,62.334 6.556,62.728 7.518,63.69 ; v1(9.846,49.673) 7.426,49.673 3.048,54.051 1.016,54.051 1.016,67.666 2.032,68.682 2.642,68.682 7.518,68.682 7.518,63.69 ; R1.1 7.518,63.398 7.518,63.69 ; v1(24.79,5.893) 24.79,6.299 25.324,6.833 25.649,6.833 26.289,7.472 26.289,7.798 26.416,7.925 27.92,7.925 43.218,23.222 43.948,23.222 44.088,23.362 IC10.29
RXD: CON14.2 IC10.31 | length 33.9
  Bottom Layer w0.406: v2@23.571,8.941 23.709,9.079 v2@24.181,8.607 ; v2@23.847,8.941 v2(23.774,8.941) v2@24.17,8.941 ; v2@24.181,8.93 23.978,9.133 23.978,9.144 39.795,24.962 IC10.31 ; v2@72.339,65.227 v2(72.339,65.166) 72.41,65.095 CON14.2
SCK: CON11.4 CON12.7 IC10.17 | length 178.4
  Top Layer w0.406: CON12.7 18.085,58.522 27.635,48.971 37.592,48.971 39.218,50.597 39.218,54.085 CON11.4
  Bottom Layer w0.406: CON11.4 31.496,57.099 5.69,31.293 5.69,22.715 24.747,3.658 61.163,3.658 62.179,4.674 62.179,9.347 53.803,17.723 IC10.17
SCL: CON10.3 CON13.1 IC10.28 R10.2 | length 195.4
  Top Layer w0.406: v1(32.999,4.75) 35.833,1.916 41.902,1.916 42.04,1.778 50.812,1.778 50.863,1.727 78.974,1.727 79.025,1.676 86.896,1.676 86.947,1.727 90.513,1.727 90.564,1.778 92.432,1.778 92.57,1.916 v1(93.181,1.916) ; R10.2@50.976,64.705 CON10.3
  Bottom Layer w0.406: v1@33.076,4.674 v1(32.999,4.75) 32.999,4.674 31.217,6.456 31.217,7.361 31.293,7.437 31.293,10.363 43.491,22.562 IC10.28 ; CON13.1 54.559,69.291 52.719,69.291 CON10.3 50.976,55.298 77.419,28.854 77.419,28.164 77.495,28.088 77.495,27.183 77.419,27.107 77.419,11.512 82.886,6.045 85.192,6.045 89.205,2.032 93.066,2.032 v1(93.181,1.916)
SDA: CON10.4 CON13.2 IC10.27 R11.2 | length 200.9
  Top Layer w0.406: v1(32.309,6.909) 29.87,6.909 28.651,5.69 28.651,2.235 29.667,1.219 41.665,1.219 41.767,1.118 50.538,1.118 50.589,1.067 78.701,1.067 78.752,1.016 87.17,1.016 87.22,1.067 90.786,1.067 90.837,1.118 92.435,1.118 92.729,0.824 93.634,0.824 94.028,1.219 95.301,1.219 95.91,1.829 v1(95.91,3.861) ; R11.2@53.516,64.728 CON10.4
  Bottom Layer w0.406: v1(32.309,6.909) 32.309,9.754 44.317,21.762 IC10.27 ; CON10.4 53.516,59.131 ; CON13.2 54.938,57.709 53.516,59.131 ; v1(95.91,3.861) 93.878,3.861 91.034,6.706 83.16,6.706 78.08,11.786 78.08,26.833 78.156,26.909 78.156,28.361 78.08,28.437 78.08,29.128 78.029,29.179 78.029,30.074 53.516,54.587 53.516,59.131
SS: CON11.8 IC10.14 | length 155.3
  Bottom Layer w0.406: CON11.8 29.539,65.099 26.416,61.976 26.416,56.408 3.607,33.598 3.607,32.703 3.556,32.653 3.556,25.463 3.556,22.047 4.064,21.539 24.028,1.575 62.859,1.575 62.91,1.626 64.211,1.626 65.227,2.642 65.227,13.411 56.877,21.762 IC10.14
TXD: CON14.3 IC10.30 | length 31.7
  Bottom Layer w0.406: v2(25.197,7.925) 25.197,8.128 24.994,8.331 40.824,24.162 IC10.30 ; v2@69.698,65.024 v2(69.87,65.196) CON14.3
VBAT: C28.2 L20.2 SW1.1 U21.4 U21.5 | length 15.2
  Bottom Layer w0.406: C28.2@88.392,32.715 C28.2
  Bottom Layer w0.635: U21.4 U21.5 87.986,31.09 88.189,31.293 89.814,31.293
  Bottom Layer w1.27: 89.814,31.293 L20.2 96.926,33.122 SW1.1 97.082,35.763 SW1.1@96.723,35.763
pads on no net: CON11.6 CON12.3 IC10.19 J21.2 J22.2 J22.3 SW1.3 U21.6 U22.6
copper on no net: | length 340
  Top Layer w0.406: 0.05,0.05 100.05,0.05 100.05,70.05 0.05,70.05 0.05,0.05

## Silkscreen, mask and mechanical layers (free items; w line width, h text height)
Mechanical 2:
  lines w0.5: 46.8,1.3 46.8,0.4 49.25,0.4 53.55,0.4 55.4,0.4 55.4,1.2
  text "Q        W         E         R         T          Y         U          I         O         P" at 10.5,26.45 h3
  text "A         S         D          F         G         H         J          K         L        DEL" at 10.4,14.133 h3
  text "Z          X         C         V          B         N        M     SHIFT   ALT   ENTER" at 10.4,1.633 h3

## Text inside footprints (layer, text, board x,y; h text height)
CON10: Top Overlay "VCC GND SCL SDA" at 44.372,70.342 h0.76
CON11: Top Overlay "CSn" at 34.512,65.613 h1.02 r180; Top Overlay "GDO0" at 34.512,63.613 h1.02 r180; Top Overlay "GDO2" at 34.512,61.613 h1.02 r180; Top Overlay "SO" at 34.512,59.613 h1.02 r180; Top Overlay "SCLK" at 34.512,57.613 h1.02 r180; Top Overlay "SI" at 34.512,55.613 h1.02 r180; Top Overlay "GND" at 34.512,53.613 h1.02 r180; Top Overlay "VCC" at 34.512,51.613 h1.02 r180
CON12: Bottom Overlay "MOSI NC RST SCK MISO" at 8.98,68.458 h0.76 r90